# Altium PCB main.PcbDoc
Units mil, origin at the board's own origin, x right, y up, seen from the top; angles counter-clockwise.
Board outline 2482.44 x 4211.85 mil, 2 copper layers (Top Layer, Bottom Layer); 92 components, 49 nets, 235 pads, 68 vias.
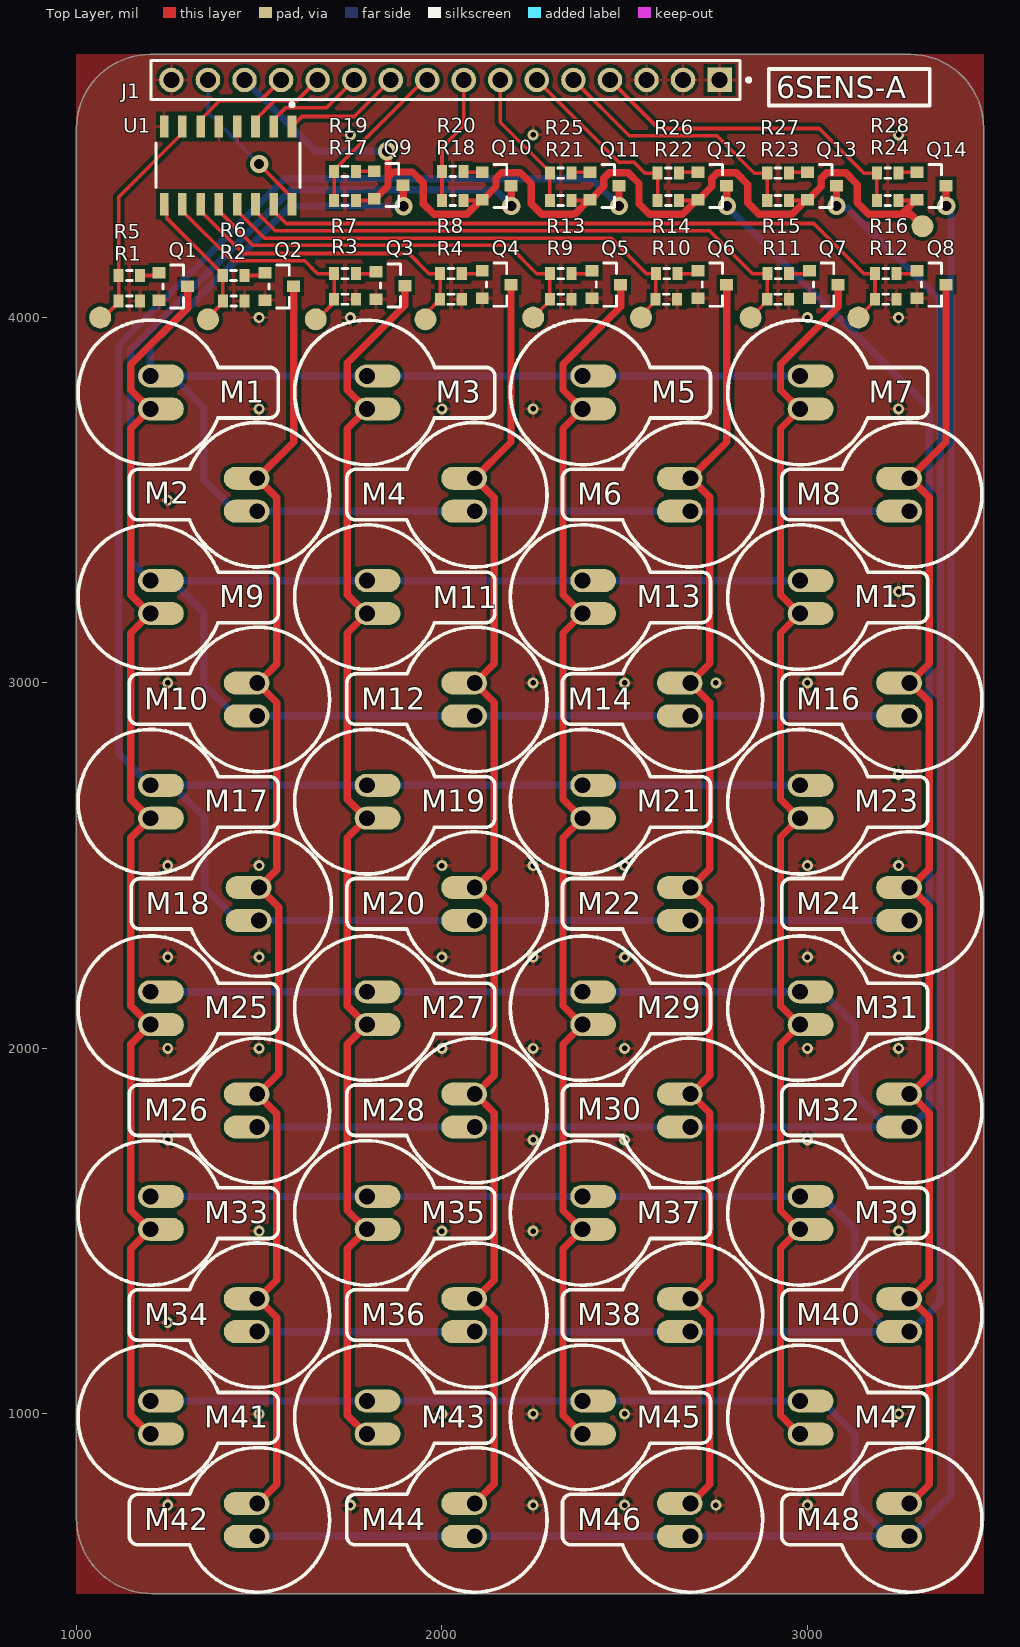
[diagram p0: Top Layer view]
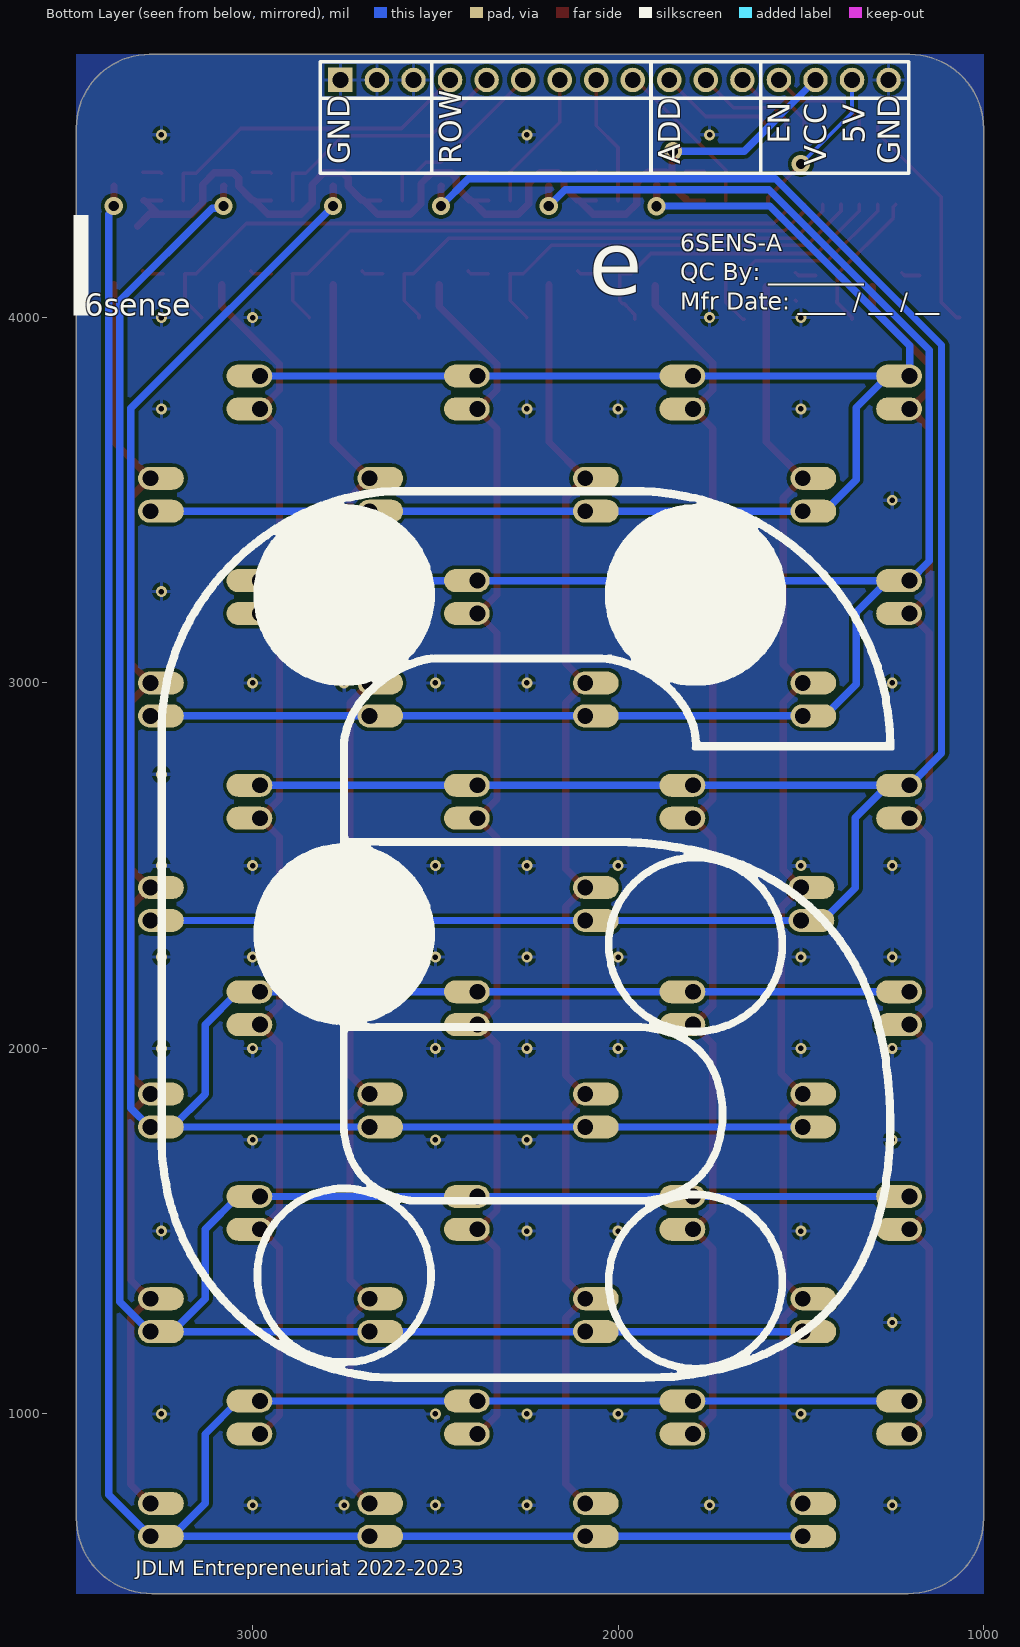
[diagram p1: Bottom Layer view, seen from below]

## Layer stack, top to bottom
Top Solder: solder mask 0.4, Solder Resist, Dk 3.5
Top Layer: signal copper 1.4
Dielectric 1: dielectric 12.6, FR-4, Dk 4.8
Bottom Layer: signal copper 1.4
Bottom Solder: solder mask 0.4, Solder Resist, Dk 3.5

## Board outline
1000,714.41 1000,4518.05 1000,4517.56 cw(c1202.44,4517.56) 1202.44,4720 3282.44,4720 cw(c3282.44,4520) 3482.44,4520 3482.44,714.41 cw(c3276.18,714.41) 3276.18,508.15 1206.26,508.15 cw(c1206.26,714.41)

## Design rules (kind name [scope] priority, off if disabled: settings)
Clearance [All] p1: gap=10 ignorepadtopadclearanceinfootprint=FALSE except(0: Arc-Hole Track-Hole SMDPad-Hole THPad-Hole Via-Hole Fill-Hole Poly-Hole Region-Hole Text-Hole)
PolygonConnect [All] p1: connectstyle=Relief reliefconductorwidth=10 reliefentries=4 polygonreliefangle="90 Angle" airgapwidth=10
RoutingVias [All] p1: holewidth=28 width=50 viastyle="Through Hole" minholewidth=12 minwidth=25 maxholewidth=28 maxwidth=50
SolderMaskExpansion [All] p1: expansion=4 istentingtop=FALSE
Width [All] p1: maxlimit=20 minlimit=10 preferedwidth=10
30 further rules are at their usual default settings.

## Classes and differential pairs
component class matrix: M1 M2 M3 M4 M5 M6 M7 M8 M9 M10 M11 M12 M13 M14 M15 M16 M17 M18 M19 M20 M21 M22 M23 M24 M25 M26 M27 M28 M29 M30 M31 M32 M33 M34 M35 M36 M37 M38 M39 M40 M41 M42 M43 M44 M45 M46 M47 M48
component class main: J1 Q1 Q2 Q3 Q4 Q5 Q6 Q7 Q8 Q9 Q10 Q11 Q12 Q13 Q14 R1 R2 R3 R4 R5 R6 R7 R8 R9 R10 R11 R12 R13 R14 R15 R16 R17 R18 R19 R20 R21 R22 R23 R24 R25 R26 R27 R28 U1

## Components (designator, comment, footprint, x,y, rotation, side; value= is the part's Value field where it differs from the comment)
J1 "61301611121" FP-61301611121-MFG 2010,4650 r180 top
M1 "M1027" M1027 1552.44,3695 r90 top
M2 "M1027" M1027 1145,3615 r270 top
M3 "M1027" M1027 2145,3695 r90 top
M4 "M1027" M1027 1740,3615 r270 top
M5 "M1027" M1027 2735,3695 r90 top
M6 "M1027" M1027 2330,3615 r270 top
M7 "M1027" M1027 3330,3695 r90 top
M8 "M1027" M1027 2930,3615 r270 top
M9 "M1027" M1027 1552.44,3135 r90 top
M10 "M1027" M1027 1145,3055 r270 top
M11 "M1027" M1027 2145,3135 r90 top
M12 "M1027" M1027 1740,3055 r270 top
M13 "M1027" M1027 2735,3135 r90 top
M14 "M1027" M1027 2330,3055 r270 top
M15 "M1027" M1027 3330,3135 r90 top
M16 "M1027" M1027 2930,3055 r270 top
M17 "M1027" M1027 1552.44,2575 r90 top
M18 "M1027" M1027 1150,2495 r270 top
M19 "M1027" M1027 2145,2575 r90 top
M20 "M1027" M1027 1740,2495 r270 top
M21 "M1027" M1027 2735,2575 r90 top
M22 "M1027" M1027 2330,2495 r270 top
M23 "M1027" M1027 3330,2575 r90 top
M24 "M1027" M1027 2930,2495 r270 top
M25 "M1027" M1027 1552.44,2010 r90 top
M26 "M1027" M1027 1145,1930 r270 top
M27 "M1027" M1027 2145,2010 r90 top
M28 "M1027" M1027 1740,1930 r270 top
M29 "M1027" M1027 2735,2010 r90 top
M30 "M1027" M1027 2330,1930 r270 top
M31 "M1027" M1027 3330,2010 r90 top
M32 "M1027" M1027 2930,1930 r270 top
M33 "M1027" M1027 1552.44,1450 r90 top
M34 "M1027" M1027 1145,1370 r270 top
M35 "M1027" M1027 2145,1450 r90 top
M36 "M1027" M1027 1740,1370 r270 top
M37 "M1027" M1027 2735,1450 r90 top
M38 "M1027" M1027 2330,1370 r270 top
M39 "M1027" M1027 3330,1450 r90 top
M40 "M1027" M1027 2930,1370 r270 top
M41 "M1027" M1027 1552.44,890 r90 top
M42 "M1027" M1027 1145,810 r270 top
M43 "M1027" M1027 2145,890 r90 top
M44 "M1027" M1027 1740,810 r270 top
M45 "M1027" M1027 2735,890 r90 top
M46 "M1027" M1027 2330,810 r270 top
M47 "M1027" M1027 3330,890 r90 top
M48 "M1027" M1027 2930,810 r270 top
Q1 "DMN3023L-7" FP-SOT23-MFG 1265,4085 r0 top
Q2 "DMN3023L-7" FP-SOT23-MFG 1555,4085 r0 top
Q3 "DMN3023L-7" FP-SOT23-MFG 1859.37,4087.6 r0 top
Q4 "DMN3023L-7" FP-SOT23-MFG 2150,4090 r0 top
Q5 "DMN3023L-7" FP-SOT23-MFG 2450,4090 r0 top
Q6 "DMN3023L-7" FP-SOT23-MFG 2740,4090 r0 top
Q7 "DMN3023L-7" FP-SOT23-MFG 3045,4090 r0 top
Q8 "DMN3023L-7" FP-SOT23-MFG 3340,4090 r0 top
Q9 "DMG2301L-7" FP-SOT23-MFG 1854.37,4362.6 r0 top
Q10 "DMG2301L-7" FP-SOT23-MFG 2150,4360 r0 top
Q11 "DMG2301L-7" FP-SOT23-MFG 2445,4360 r0 top
Q12 "DMG2301L-7" FP-SOT23-MFG 2740,4360 r0 top
Q13 "DMG2301L-7" FP-SOT23-MFG 3040,4360 r0 top
Q14 "DMG2301L-7" FP-SOT23-MFG 3340,4360 r0 top
R1 "Res3" J1-0603 1145,4045 r0 top value=1K
R2 "Res3" J1-0603 1430.47,4045 r0 top value=1K
R3 "Res3" J1-0603 1735,4050 r0 top value=1K
R4 "Res3" J1-0603 2025,4050 r0 top value=1K
R5 "Res3" J1-0603 1145,4115 r0 top value=1K
R6 "Res3" J1-0603 1430,4115 r0 top value=1K
R7 "Res3" J1-0603 1735,4120 r0 top value=1K
R8 "Res3" J1-0603 2025,4120 r0 top value=1K
R9 "Res3" J1-0603 2325,4050 r0 top value=1K
R10 "Res3" J1-0603 2614.53,4050 r0 top value=1K
R11 "Res3" J1-0603 2920,4050 r0 top value=1K
R12 "Res3" J1-0603 3215,4050 r0 top value=1K
R13 "Res3" J1-0603 2325.47,4120 r0 top value=1K
R14 "Res3" J1-0603 2615,4120 r0 top value=1K
R15 "Res3" J1-0603 2920.47,4120 r0 top value=1K
R16 "Res3" J1-0603 3215,4120 r0 top value=1K
R17 "Res3" J1-0603 1735,4320 r0 top value=1K
R18 "Res3" J1-0603 2030,4320 r0 top value=1K
R19 "Res3" J1-0603 1735,4400 r0 top value=1K
R20 "Res3" J1-0603 2030,4400 r0 top value=1K
R21 "Res3" J1-0603 2325,4320 r0 top value=1K
R22 "Res3" J1-0603 2620,4320 r0 top value=1K
R23 "Res3" J1-0603 2920,4320 r0 top value=1K
R24 "Res3" J1-0603 3220,4320 r0 top value=1K
R25 "Res3" J1-0603 2325,4395 r0 top value=1K
R26 "Res3" J1-0603 2620,4395 r0 top value=1K
R27 "Res3" J1-0603 2920,4395 r0 top value=1K
R28 "Res3" J1-0603 3220,4395 r0 top value=1K
U1 "CD74HC238M96" FP-D0016A-MFG 1415,4416.3 r270 top

## Footprints (in the part's own frame and the unit in brackets; to place one, negate y for a bottom-side part, rotate by r counter-clockwise, add the part's x,y. Pads: shape width x height; smd on the part's side, far side on the other; paste and mask are expansions set on the pad)
FP-61301611121-MFG [mm]
  rect 1.7x1.7 hole 1.1 paste-1000 mask+0: 1(-19.05,0)
  round 1.7 hole 1.1 paste-1000 mask+0: 2(-16.51,0) 3(-13.97,0) 4(-11.43,0) 5(-8.89,0) 6(-6.35,0) 7(-3.81,0) 8(-1.27,0) 9(1.27,0) 10(3.81,0) 11(6.35,0) 12(8.89,0) 13(11.43,0) 14(13.97,0) 15(16.51,0) 16(19.05,0)
  silkscreen extent -21.2,-1.35 20.47,1.35, body extent -20.57,-1.45 20.57,1.45, height 0.25
FP-D0016A-MFG [mm]
  rect 1.55x0.6 smd paste-1000 mask+0: 1(-2.7,4.445) 2(-2.7,3.175) 3(-2.7,1.905) 4(-2.7,0.635) 5(-2.7,-0.635) 6(-2.7,-1.905) 7(-2.7,-3.175) 8(-2.7,-4.445) 9(2.7,-4.445) 10(2.7,-3.175) 11(2.7,-1.905) 12(2.7,-0.635) 13(2.7,0.635) 14(2.7,1.905) 15(2.7,3.175) 16(2.7,4.445)
  silkscreen extent -4.35,-5 1.55,5, body extent -3.57,-5.25 3.57,5.25, height 0.25
FP-SOT23-MFG [mm]
  rect 0.9x0.8 smd paste+0 mask+0: 1(-1,0.95) 2(-1,-0.95) 3(1,0)
  silkscreen extent -0.7,-1.5 0.7,1.5, body extent -1.55,-1.6 1.55,1.6, height 0.25
J1-0603 [mm] "Chip Resistor, Body 1.6x0.8mm, IPC High Density"
  rect 0.7x0.9 smd: 1(-0.75,0) 2(0.75,0)
  silkscreen extent -0.2,-0.35 0.2,0.35, body extent -0.85,-0.48 0.85,0.48, height 0.9
M1027 [mm]
  rrect100% 1.6x3.175 hole 1.1 copper offset 0,-0.737: 1(1.397,8.89) 2(3.683,8.89)
  silkscreen extent -2.48,0 7.56,13.91

## Part data
J1: library part CMP-1502-01095-2, "CONN HEADER VERT 16POS 2.54MM", Color=Black, Flammability Rating="UL94 V-0", Max Operating Temperature=105°C, Min Operating Temperature=-40°C, Voltage Rating=250V, Connector Type=Header, Contact Finish - Mating=GOLD, Contact Material="Copper Alloy", Contact Mating Length=0.236inch, Contact Plating=Gold, Contact Shape=Square, Contact Type="Male Pin", Fastening Type=Pull, Gender=Male, Insulation Color=Black, Insulation Material=Nylon, Mount="Through Hole", Number of Contacts=16, Number of Positions=16, Number of Rows=1, Packaging=Bulk, Pitch=0.1inch, RoHS Compliant=Yes, Series=WR-PHD, Termination=Solder
M1 M2 M3 M4 M5 M6 M7 M8 M9 M10 M11 M12 M13 M14 M15 M16 M17 M18 M19 M20 M21 M22 M23 M24 M25 M26 M27 M28 M29 M30 M31 M32 M33 M34 M35 M36 M37 M38 M39 M40 M41 M42 M43 M44 M45 M46 M47 M48: "10mm x 2.7mm vibration motor"
Q1 Q2 Q3 Q4 Q5 Q6 Q7 Q8: library part CMP-12801-000035-1, "MOSFET N-CH 30V 6.2A SOT23", Continuous Drain Current=6.2A, Drain To Source Breakdown Voltage=30V, Drain To Source Resistance=25mΩ, Gate To Source Voltage=20V, Input Capacitace At Vds="873pF @ 15V", Manufacturer="Diodes Inc.", Max Forward Diode Voltage=1.2V, Max Junction Temp=+150°C, Package=SOT23, Power Dissipation=0.9W, Pulse Drain Current=44A, Temperature="-55°C to +150°C", Temperature Range Low=-55°C, Automotive=Yes, Automotive Grade="Grade 0", Category=Trans, ComponentLink2Description=Datasheet, ComponentLink2URL=https://www.diodes.com/assets/Datasheets/DMN3023L.pdf, Depletion Mode=False, Device Class L1="Discrete Semiconductors", Device Class L2=Transistors, Device Class L3=MOSFETs, Digikey Description="MOSFET N-CH 30V 6.2A SOT23", Drain To Source Voltage=30V, Footprint Url=https://www.diodes.com/assets/Package-Files/SOT23.pdf, Gate Charge At Vgs="18.4nC @ 10V", Height=1.1mm, Lead Free=Yes, Manufacturer Part Number=DMN3023L-7, Mouser Description="MOSFET N-Ch Enh Mode FET 30Vdss 20Vgss 51A", Number Of Channels=1, Number Of N Channels=1, Octopart=https://octopart.com/dmn3023l-7-diodes+inc.-65294126, RoHS=TRUE, Rthja Max=97°C/W, Standoff Height=0.013mm, Temperature Range High=+150°C, Threshold Vgs Max=1.8V, Threshold Vgs Min=0.8V, Turn Off Delay Time=231ns, Turn On Delay Time=17ns
Q9 Q10 Q11 Q12 Q13 Q14: library part CMP-12801-000065-1, "MOSFET P-CH 20V 3A SOT23", Continuous Drain Current=-3A, Drain To Source Breakdown Voltage=-20V, Drain To Source Resistance=120mΩ, Gate To Source Voltage=8V, Input Capacitace At Vds="476pF @ -10V", Manufacturer="Diodes Inc.", Max Forward Diode Voltage=-1.2V, Max Junction Temp=+150°C, Package=SOT23, Power Dissipation=1.5W, Pulse Drain Current=-10A, Temperature="-55°C to +150°C", Temperature Range Low=-55°C, Automotive=No, Category=Trans, ComponentLink2Description=Datasheet, ComponentLink2URL=https://www.diodes.com/assets/Datasheets/DMG2301L.pdf, Depletion Mode=False, Device Class L1="Discrete Semiconductors", Device Class L2=Transistors, Device Class L3=MOSFETs, Digikey Description="MOSFET P-CH 20V 3A SOT23", Drain To Source Voltage=-20V, Footprint Url=https://www.diodes.com/assets/Package-Files/SOT23.pdf, Gate Charge At Vgs="5.5nC @ -4.5V", Height=1.1mm, Lead Free=Yes, Manufacturer Part Number=DMG2301L-7, Mouser Description="Single P-Channel 20 V 1.5 W 5.5 nC Silicon Surface Mount Mosfet - SOT-23", Number Of Channels=1, Number Of P Channels=1, Octopart=https://octopart.com/dmg2301l-7-diodes+inc.-67250456, RoHS=TRUE, Rthja Max=83°C/W, Standoff Height=0.013mm, Temperature Range High=+150°C, Threshold Vgs Max=-1.2V, Threshold Vgs Min=-0.4V, Turn Off Delay Time=30ns, Turn On Delay Time=5ns
R1 R2 R3 R4 R5 R6 R7 R8 R9 R10 R11 R12 R13 R14 R15 R16 R17 R18 R19 R20 R21 R22 R23 R24 R25 R26 R27 R28: "Resistor", LatestRevisionDate=29-May-2009, LatestRevisionNote="IPC-7351 Footprint Added.", PackageDescription="Chip Resistor", PackageReference=J1-0603, Published=8-Jun-2000, Publisher="Altium Limited"
U1: library part CMP-1633-00102-3, "IC 3-8 DECODER/DEMUX HS 16-SOIC", Ambient Temperature Range High=+125°C, Ambient Temperature Range Low=-55°C, Manufacturer="Texas Instruments", Max Junction Temp=+150°C, Max Supply Voltage=6V, Min Supply Voltage=2V, Package=D0016A, Quiescent Current=8uA, Temperature="-55°C to +125°C", Automotive=No, Category=IC, ComponentLink2Description=Datasheet, ComponentLink2URL=http://www.ti.com/lit/ds/symlink/cd74hc238.pdf, Device Class L1="Integrated Circuits (ICs)", Device Class L2="Logic ICs", Device Class L3=Decoders, Digikey Description="IC 3-8 DECODER/DEMUX HS 16-SOIC", Height=1.75mm, Ipc Land Pattern Name=SOIC127P600X175-16, Lead Free=Yes, Manufacturer Part Number=CD74HC238M96, Mouser Description="High Speed CMOS Logic 3-to-8 Line Decoder Demultiplexer Inverting and Non-Inverting 16-SOIC -55 to 125", Number Of Circuits=1, Number Of Inputs=6, Number of Outputs=8, Octopart=https://octopart.com/cd74hc238m96-texas+instruments-1365099, Propagation Delay=13ns, RoHS=TRUE, Standoff Height=0.25mm, Temperature Range High=+125°C, Temperature Range Low=-55°C

## Free pads (board coordinates)
  round 60 smd: 3(1065,4000) 4(1360,3995) 5(1655,3995) 6(1955,3995) 7(2250,4000) 8(2545,4000) 9(2845,4000) 10(3140,4000) 11(3315,4250)

## Via types
v1: diameter 30, hole 15, Top Layer to Bottom Layer, 60 vias
v2: diameter 50, hole 28, Top Layer to Bottom Layer, 8 vias

## Nets (pads, with @x,y where several pads share a name; then routed paths per layer and width w, separated by ;. In a path a pad name is that pad's centre, name@x,y a point inside that pad or via, vN(x,y) a via of type N, cw(c..) or ccw(c..) an arc to the next point about the centre after c; other vN are vias at no path point)
5V: J1.15 U1.16 | length 435.3
  Top Layer w10: v2(1500,4420) 1500,4418.7 1590,4328.7 U1.16
  Bottom Layer w10: J1.15 1360,4560 v2(1500,4420)
address_1: J1.10 U1.1 | length 322.8
  Top Layer w10: U1.1 1617.4,4550 1760,4550 J1.10
address_2: J1.11 U1.2 | length 283.7
  Top Layer w10: U1.2 1540,4541.3 1572.31,4573.61 1683.61,4573.61 J1.11
address_3: J1.12 U1.3 | length 233.7
  Top Layer w10: U1.3 1490,4541.3 1542.31,4593.61 1603.61,4593.61 J1.12
column_1: pad.3 R1.1 R5.1 U1.7 | length 621.3
  Top Layer w10: pad.3 1074.41,4000 1115.47,4041.06 R1.1 R5.1 1115.47,4329.37 1290,4503.9 U1.7
column_2: pad.4 R2.1 R6.1 U1.9 | length 398.6
  Top Layer w10: U1.9 1246.81,4303.19 1246.81,4272.6 1400.47,4118.94 R6.1 1400.71,4114.76 1400.71,4045.24 R2.1 1400.94,4041.06 1360,4000.12 pad.4
column_3: pad.5 R3.1 R7.1 U1.10 | length 653.3
  Top Layer w10: U1.10 1290,4291.3 1426.3,4155 1625,4155 1660,4120 R7.1 1705.24,4119.76 1705.24,4045.24 1705,4045 1705,4041.06 1658.94,3995 pad.5
column_4: pad.6 R4.1 R8.1 U1.11 | length 889.2
  Top Layer w10: U1.11 1340,4291.3 1456.3,4175 1910,4175 1965,4120 R8.1 1995.47,4046.06 1986.69,4037.28 1982.76,4037.28 1969.56,4024.08 1969.56,4023.09 1955,4008.53 pad.6
column_5: pad.7 R9.1 R13.1 U1.12 | length 1134.6
  Top Layer w10: U1.12 1390,4291.3 1484.02,4197.28 2182.72,4197.28 2260,4120 R13.1 2295.71,4119.76 2295.71,4050.24 R9.1 2295.47,4046.06 2250,4000.59 pad.7
column_6: pad.8 R10.1 R14.1 U1.13 | length 1371.9
  Top Layer w10: U1.13 1440,4291.3 1514.02,4217.28 2462.72,4217.28 2560,4120 R14.1 2585.24,4119.76 2585.24,4050.24 R10.1 2585,4046.06 2545,4006.06 pad.8
column_7: pad.9 R11.1 R15.1 U1.14 | length 1629.6
  Top Layer w10: U1.14 1490,4291.3 1544.02,4237.28 2732.72,4237.28 2850,4120 R15.1 2890.71,4119.76 2890.71,4050.24 R11.1 2890.47,4046.06 2845,4000.59 pad.9
column_8: pad.10 R12.1 R16.1 U1.15 | length 1874
  Top Layer w10: U1.15 1540,4291.3 1574.02,4257.28 3017.72,4257.28 3155,4120 R16.1 R12.1 3185.47,4046.06 3140,4000.59 pad.10
enable: J1.13 U1.6 | length 283.7
  Top Layer w10: U1.6 1340,4541.3 1392.31,4593.61 1503.61,4593.61 J1.13
GND: J1.1 J1.2 J1.3 J1.16 Q1.2 Q2.2 Q3.2 Q4.2 Q5.2 Q6.2 Q7.2 Q8.2 R1.2 R2.2 R3.2 R4.2 R9.2 R10.2 R11.2 R12.2 U1.4 U1.5 U1.8 | length 14.7
  Top Layer w10: Q1.2@1223.03,4045 Q1.2 ; Q2.2@1513.03,4045 Q2.2 ; Q3.2@1814.8,4045 Q3.2
  other v1: 1250,750 1750,750 2250,750 2500,750 2750,750 3000,750 1500,1000 2000,1000 2250,1000 2500,1000 3250,1000 1250,1250 1500,1500 2000,1500 2250,1500 3250,1500 1250,1750 2250,1750 2500,1750 3000,1750 1250,2000 1500,2000 2000,2000 2250,2000 2500,2000 3000,2000 3250,2000 1250,2250 1500,2250 2000,2250 2250,2250 2500,2250 3000,2250 3250,2250 1250,2500 1500,2500 2000,2500 2250,2500 2500,2500 3000,2500 3250,2500 3250,2750 1250,3000 2250,3000 2500,3000 2750,3000 3000,3000 3250,3250 1250,3500 1500,3750 2000,3750 2250,3750 3250,3750 1500,4000 1750,4000 3000,4000 3250,4000 1750,4500 2250,4500 3250,4500
NetM1_1: M1.1 M9.1 M17.1 M25.1 M33.1 M41.1 Q1.3 | length 3455.2
  Top Layer w20: M41.1 1200.44,945 1148.94,996.5 1148.94,1451.5 M33.1 1200.44,1505 1148.94,1556.5 1148.94,2011.5 M25.1 1200.44,2065 1148.94,2116.5 1148.94,2576.5 M17.1 1200.44,2630 1148.94,2681.5 1148.94,3136.5 M9.1 1200.44,3190 1148.94,3241.5 1148.94,3696.5 M1.1 1200.44,3750 1148.94,3801.5 1148.94,3871.25 1304.37,4026.68 Q1.3
NetM1_2: M1.2 M2.2 M3.2 M4.2 M5.2 M6.2 M7.2 M8.2 Q9.3 | length 5056.3
  Top Layer w20: Q9.3 1894.37,4361.97 1894.37,4305.12 v2(1895,4304.49)
  Bottom Layer w20: v2(1895,4304.49) 1894.49,4305 1585,4305 1202.44,3922.44 M1.2 M1.2@1262.44,3840 ; M7.2 M5.2 M3.2 M1.2@1262.44,3840 ; M8.2 M6.2 M4.2 M2.2 1435,3470 1348.72,3556.28 1348.72,3753.72 M1.2@1262.44,3840
NetM2_1: M2.1 M10.1 M18.1 M26.1 M34.1 M42.1 Q2.3 | length 3596.6
  Top Layer w20: M42.1 1497,755 1548.5,806.5 1548.5,1263.5 M34.1@1497,1315 ; M34.1 M34.1@1497,1315 ; Q2.3 1594.37,3659.37 M2.1 1548.5,3506.5 1548.5,3051.5 1497,3000 M10.1 1548.5,2946.5 1548.5,2488.5 M18.1 1553.5,2386.5 1553.5,1931.5 1497,1875 M26.1 1548.5,1821.5 1548.5,1366.5 M34.1@1497,1315
NetM3_1: M3.1 M11.1 M19.1 M27.1 M35.1 M43.1 Q3.3 | length 3458.5
  Top Layer w20: M43.1 1793,945 1741.5,996.5 1741.5,1451.5 M35.1 1793,1505 1741.5,1556.5 1741.5,2011.5 M27.1 1793,2065 1741.5,2116.5 1741.5,2576.5 M19.1 1793,2630 1741.5,2681.5 1741.5,3136.5 M11.1 1793,3190 1741.5,3241.5 1741.5,3696.5 M3.1 1793,3750 1741.5,3801.5 1741.5,3875.5 1898.74,4032.74 Q3.3
NetM4_1: M4.1 M12.1 M20.1 M28.1 M36.1 M44.1 Q4.3 | length 3598.8
  Top Layer w20: M44.1 2143.5,808.5 2143.5,1263.5 M36.1@2092,1315 ; M36.1 M36.1@2092,1315 ; M28.1 M28.1@2092,1875 ; M20.1 M20.1@2092,2440 ; Q4.3 2189.37,3659.37 M4.1 2143.5,3506.5 2143.5,3053.5 M12.1 2143.5,2946.5 2143.5,2491.5 M20.1@2092,2440 ; M36.1@2092,1315 2143.5,1366.5 2143.5,1823.5 M28.1@2092,1875 ; M28.1@2092,1875 2143.5,1926.5 2143.5,2388.5 M20.1@2092,2440
NetM5_1: M5.1 M13.1 M21.1 M29.1 M37.1 M45.1 Q5.3 | length 3461.2
  Top Layer w20: M45.1 2383,945 2331.5,996.5 2331.5,1451.5 M37.1 2383,1505 2331.5,1556.5 2331.5,2011.5 M29.1 2383,2065 2331.5,2116.5 2331.5,2576.5 M21.1 2383,2630 2331.5,2681.5 2331.5,3136.5 M13.1 2383,3190 2331.5,3241.5 2331.5,3696.5 M5.1 2383,3750 2331.5,3801.5 2331.5,3872.53 2489.37,4030.4 Q5.3
NetM6_1: M6.1 M14.1 M22.1 M30.1 M38.1 M46.1 Q6.3 | length 3602
  Top Layer w20: M46.1 2682,755 2733.5,806.5 2733.5,1263.5 M38.1@2682,1315 ; M38.1 M38.1@2682,1315 ; M30.1 M30.1@2682,1875 ; Q6.3 2779.37,3659.37 M6.1 2682,3560 2733.5,3508.5 2733.5,3053.5 M14.1 2733.5,2946.5 2733.5,2491.5 2682,2440 M22.1 2733.5,2386.5 2733.5,1926.5 M30.1@2682,1875 ; M38.1@2682,1315 2733.5,1366.5 2733.5,1823.5 M30.1@2682,1875
NetM7_1: M7.1 M15.1 M23.1 M31.1 M39.1 M47.1 Q7.3 | length 3459.5
  Top Layer w20: M47.1 2978,945 2926.5,996.5 2926.5,1453.5 M39.1@2978,1505 ; M39.1 M39.1@2978,1505 ; M23.1 M23.1@2978,2630 ; Q7.3 3084.37,4030.4 2926.5,3872.53 2926.5,3801.5 2978,3750 M7.1 2926.5,3696.5 2926.5,3241.5 2978,3190 M15.1 2926.5,3136.5 2926.5,2681.5 M23.1@2978,2630 ; M39.1@2978,1505 2926.5,1556.5 2926.5,2011.5 M31.1 2978,2065 2926.5,2116.5 2926.5,2578.5 M23.1@2978,2630
NetM8_1: M8.1 M16.1 M24.1 M32.1 M40.1 M48.1 Q8.3 | length 3602.3
  Top Layer w20: M48.1 3282,755 3333.5,806.5 3333.5,1263.5 M40.1@3282,1315 ; M40.1 M40.1@3282,1315 ; M32.1 M32.1@3282,1875 ; M24.1 M24.1@3282,2440 ; Q8.3 3379.37,3659.37 M8.1 3282,3560 3333.5,3508.5 3333.5,3053.5 M16.1 3282,3000 3333.5,2948.5 3333.5,2491.5 M24.1@3282,2440 ; M40.1@3282,1315 3333.5,1366.5 3333.5,1823.5 M32.1@3282,1875 ; M32.1@3282,1875 3333.5,1926.5 3333.5,2388.5 M24.1@3282,2440
NetM9_2: M9.2 M10.2 M11.2 M12.2 M13.2 M14.2 M15.2 M16.2 Q10.3 | length 6073.8
  Top Layer w20: Q10.3 2189.69,4359.69 2189.69,4305.31 v2(2190,4305)
  Bottom Layer w20: v2(2190,4305) 2145.51,4349.49 1587.06,4349.49 1148.94,3911.37 1148.94,3333.5 M9.2 ; M15.2 M13.2 M11.2 M9.2 ; M16.2 M14.2 M12.2 M10.2 1435,2910 1348.72,2996.28 1348.72,3193.72 1262.44,3280 M9.2
NetM17_2: M17.2 M18.2 M19.2 M20.2 M21.2 M22.2 M23.2 M24.2 Q11.3 | length 6946.7
  Top Layer w20: Q11.3 2484.69,4359.69 2484.69,4305.31 v2(2485,4305)
  Bottom Layer w20: v2(2485,4305) 2410.51,4379.49 1569.49,4379.49 1115,3925 1115,2807.44 M17.2 M17.2@1262.44,2720 ; M23.2 M21.2 M19.2 M17.2@1262.44,2720 ; M24.2 M22.2 M20.2 M18.2 1440,2350 1351.22,2438.78 1351.22,2631.22 M17.2@1262.44,2720
NetM25_2: M25.2 M26.2 M27.2 M28.2 M29.2 M30.2 M31.2 M32.2 Q12.3 | length 6895
  Top Layer w20: Q12.3 2779.68,4359.69 2779.68,4305.31 v2(2780,4305)
  Bottom Layer w20: M25.2 M27.2 M29.2 M31.2 3040,2155 3130,2065 3130,1875 M32.2@3220,1785 ; M26.2 M28.2 M30.2 M32.2@3220,1785 ; v2(2780,4305) 3333.5,3751.5 3333.5,1836.5 3282,1785 M32.2 M32.2@3220,1785
NetM33_2: M33.2 M34.2 M35.2 M36.2 M37.2 M38.2 M39.2 M40.2 Q13.3 | length 7370.2
  Top Layer w20: Q13.3 3079.68,4359.69 3079.68,4305.31 v2(3080,4305)
  Bottom Layer w20: M33.2 M35.2 M37.2 M39.2 3040,1595 3130,1505 3130,1315 M40.2@3220,1225 ; M34.2 M36.2 M40.2@3220,1225 ; v2(3080,4305) 3085.74,4299.26 3110.74,4299.26 3363.5,4046.5 3363.5,1306.5 3282,1225 M40.2 M40.2@3220,1225
NetM41_2: M41.2 M42.2 M43.2 M44.2 M45.2 M46.2 M47.2 M48.2 Q14.3 | length 7815
  Top Layer w20: Q14.3 3379.68,4359.69 3379.68,4305.31 v2(3380,4305)
  Bottom Layer w20: M41.2 M43.2 M45.2 M47.2 3040,1035 3130,945 3130,755 M48.2@3220,665 ; M42.2 M44.2 M48.2@3220,665 ; v2(3380,4305) 3380,4296.88 3393.5,4283.38 3393.5,778.5 M48.2 M48.2@3220,665
NetQ1_1: Q1.1 R5.2 | length 52.2
  Top Layer w10: R5.2 1216.26,4115 Q1.1@1223.66,4122.4
NetQ2_1: Q2.1 R6.2 | length 59.2
  Top Layer w10: R6.2 1506.26,4115 1513.66,4122.4 Q2.1
NetQ3_1: Q3.1 R7.2 | length 57.5
  Top Layer w10: R7.2 1813.03,4120 1818.03,4125 Q3.1
NetQ4_1: Q4.1 R8.2 | length 59.2
  Top Layer w10: R8.2 2103.23,4120 Q4.1
NetQ5_1: Q5.1 R13.2 | length 58.7
  Top Layer w10: R13.2 2403.23,4120 Q5.1
NetQ6_1: Q6.1 R14.2 | length 59.2
  Top Layer w10: R14.2 2693.23,4120 Q6.1
NetQ7_1: Q7.1 R15.2 | length 58.7
  Top Layer w10: R15.2 2998.23,4120 Q7.1
NetQ8_1: Q8.1 R16.2 | length 59.2
  Top Layer w10: R16.2 3293.23,4120 Q8.1
NetQ9_1: Q9.1 R19.2 | length 50.5
  Top Layer w10: R19.2 Q9.1
NetQ10_1: Q10.1 R20.2 | length 52.2
  Top Layer w10: R20.2 2062.13,4397.4 Q10.1
NetQ11_1: Q11.1 R25.2 | length 52.1
  Top Layer w10: R25.2 2356.93,4397.4 Q11.1
NetQ12_1: Q12.1 R26.2 | length 52.1
  Top Layer w10: R26.2 2651.93,4397.4 Q12.1
NetQ13_1: Q13.1 R27.2 | length 52.1
  Top Layer w10: R27.2 2951.93,4397.4 Q13.1
NetQ14_1: Q14.1 R28.2 | length 52.1
  Top Layer w10: R28.2 3251.93,4397.4 Q14.1
row_1: J1.9 R17.1 R19.1 | length 440.4
  Top Layer w10: R17.1 R19.1 1705.47,4403.94 1951.54,4650 J1.9
row_2: J1.8 R18.1 R20.1 | length 354.7
  Top Layer w10: R18.1 R20.1 2000.47,4465.47 2060,4525 J1.8
row_3: J1.7 R21.1 R25.1 | length 386.1
  Top Layer w10: J1.7 2160,4534.41 2295.47,4398.94 R25.1 R21.1
row_4: J1.6 R22.1 R26.1 | length 511.1
  Top Layer w10: J1.6 2485,4425 2526.05,4425 2556.05,4395 R26.1 R22.1
row_5: J1.5 R23.1 R27.1 | length 711.1
  Top Layer w10: J1.5 2512.95,4497.05 2752.95,4497.05 2855,4395 R27.1 R23.1
row_6: J1.4 R24.1 R28.1 | length 911.1
  Top Layer w10: J1.4 2592.95,4517.05 3032.95,4517.05 3155,4395 R28.1 R24.1
VCC: J1.14 pad.11 Q9.2 Q10.2 Q11.2 Q12.2 Q13.2 Q14.2 R17.2 R18.2 R21.2 R22.2 R23.2 R24.2 | length 3078.8
  Top Layer w10: R17.2 1809.8,4320 Q9.2 ; R18.2 Q10.2@2106.06,4320 ; Q10.2@2108.03,4320 Q10.2 ; R21.2 Q11.2@2401.06,4320 ; Q11.2@2403.03,4320 Q11.2 ; R22.2 Q12.2@2696.06,4320 ; Q12.2@2698.03,4320 Q12.2 ; R23.2 Q13.2@2996.06,4320 ; Q13.2@2998.03,4320 Q13.2 ; R24.2 Q14.2@3296.06,4320 ; Q14.2@3298.03,4320 Q14.2
  Top Layer w20: Q9.2 1816.97,4325.2 1852.72,4360.94 1852.72,4383.32 ; v2(1850,4455) 1852.72,4452.28 1852.72,4383.32 ; Q10.2@2108.03,4320 2106.06,4320 2068.35,4282.28 1978.41,4282.28 1949.07,4311.62 1949.07,4369.01 1919.74,4398.35 1867.74,4398.35 1852.72,4383.32 ; Q10.2 2112.6,4322.6 2148.35,4358.35 2148.35,4380.73 2163.37,4395.75 2215.37,4395.75 2244.39,4366.73 2244.39,4311.3 2273.41,4282.28 2363.35,4282.28 2401.06,4320 Q11.2@2403.03,4320 ; Q11.2 2407.6,4322.6 2443.35,4358.35 2443.35,4380.73 2458.37,4395.75 2510.37,4395.75 2539.39,4366.73 2539.39,4311.3 2568.41,4282.28 2658.35,4282.28 2696.06,4320 Q12.2@2698.03,4320 ; Q12.2 2702.6,4322.6 2738.35,4358.35 2738.35,4380.73 2753.37,4395.75 2805.37,4395.75 2836.89,4364.23 2836.89,4313.8 2868.41,4282.28 2958.35,4282.28 2996.06,4320 Q13.2@2998.03,4320 ; Q13.2 3002.6,4322.6 3038.35,4358.35 3038.35,4380.73 3053.37,4395.75 3105.37,4395.75 3136.89,4364.23 3136.89,4313.8 3168.41,4282.28 3258.35,4282.28 ; Q14.2@3298.03,4320 3296.06,4320 3265.39,4289.33 3258.35,4282.28 ; pad.11 3282.72,4282.28 3258.35,4282.28
  Bottom Layer w20: J1.14 1655,4455 v2(1850,4455)

## Polygon pours and split planes (outlines as drawn)
GND on Top Layer "GND_L01_P000" (solid, pour order 0): 1000,4720 1000,508.15 3482.44,508.15 3482.44,4720
GND on Bottom Layer "GND_L02_P001" (solid, pour order 1): 1000,4720 1000,508.15 3482.44,508.15 3482.44,4720

## Silkscreen, mask and mechanical layers (free items; w line width, h text height)
Top Overlay:
  lines w10: 2895,4580 3335,4580 3335,4680 2895,4680 2895,4580
  text "6SENS-A" at 2915,4600 h60
Bottom Overlay:
  drawing of 22 lines, arcs and shapes, not listed
  text "5V" at 1325,4475 h60 r270
  text "EN" at 1530,4475 h60 r270
  text "GND" at 1230,4420 h60 r270
  text "ADD" at 1830,4420 h60 r270
  text "ROW" at 2430,4420 h60 r270
  text "GND" at 2735,4420 h60 r270
  text "VCC" at 1430,4415 h60 r270
  text "6SENS-A / QC By: ________ / Mfr Date: ____ / __ / __" at 1830,4005 h80
  text "e" at 2080,4005 h300
  text "6sense" at 3460,4005 h60
  text "JDLM Entrepreneuriat 2022-2023" at 3320,558.33 h40
Mechanical 1:
  lines w10: 1000,4517.56 cw(c1202.44,4517.56) 1202.44,4720 3282.44,4720 cw(c3282.44,4520) 3482.44,4520 3482.44,714.41 cw(c3276.18,714.41) 3276.18,508.15 1206.26,508.15 cw(c1206.26,714.41) 1000,714.41 1000,4518.05